# EAGLE board LPM3_front_panel_P3 (EAGLE 7.7.0)
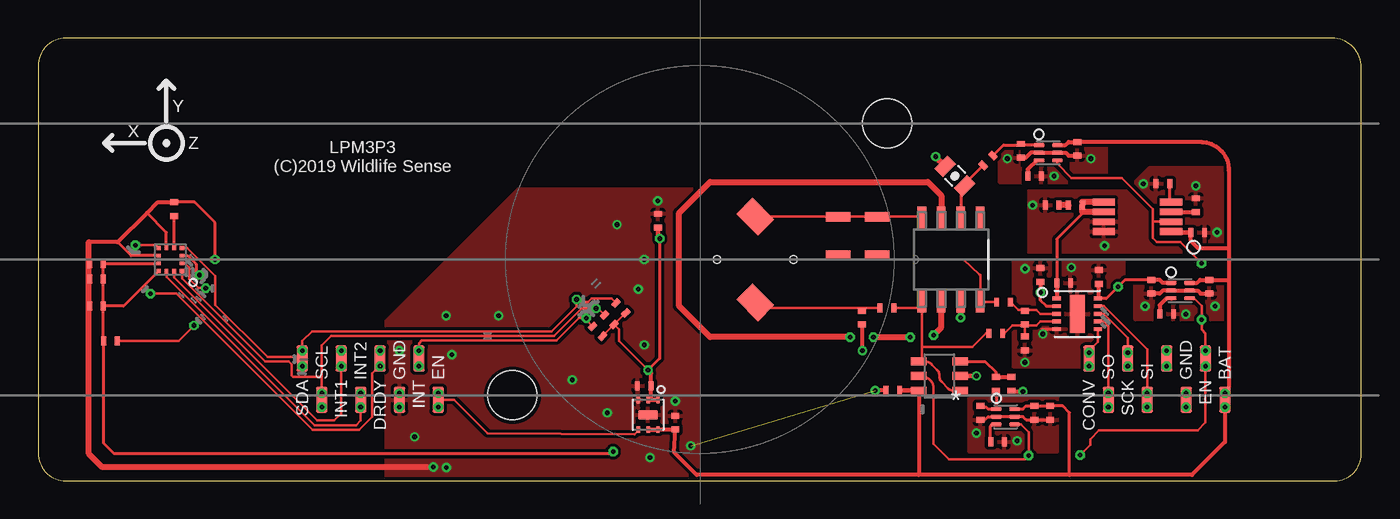
[diagram p0: board, top side]
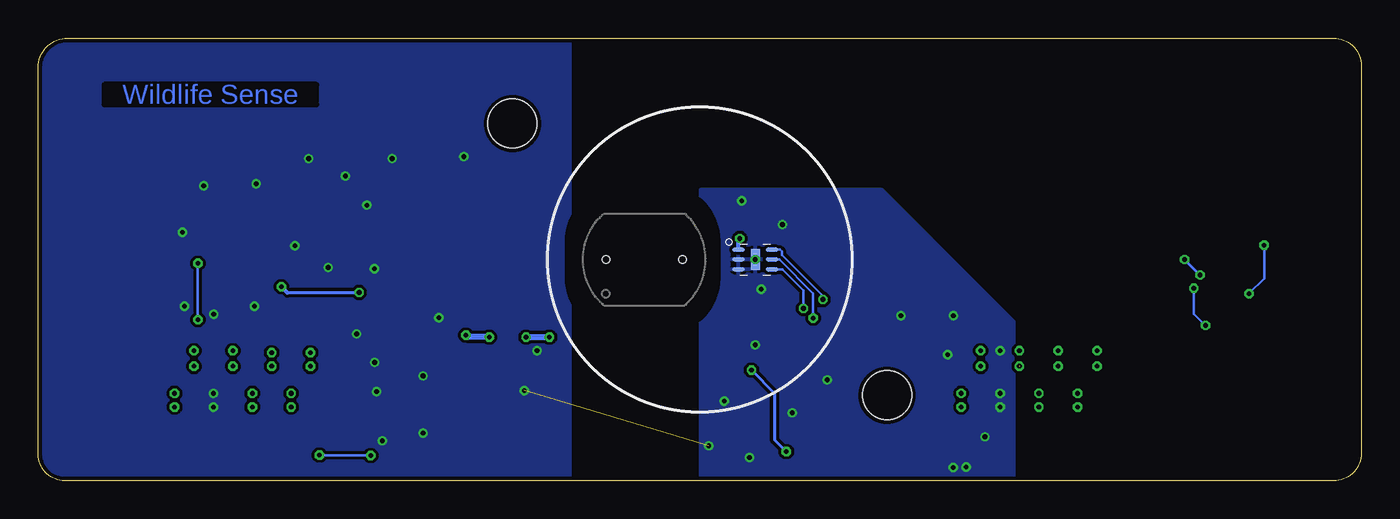
[diagram p1: board, bottom side, seen from below]

Size 86.51 x 28.96 mm. Coordinates in mm from the lower left corner, seen from the top.
Outline: 0,27.16 0,1.8 arc90 1.8,0 84.79,0 arc90 86.51,1.73 86.51,27.05 arc90 84.61,28.96 1.8,28.96 arc90 0,27.16
Copper layers (1*16): Top 0.035mm / dielectric 1.5mm / Bottom 0.035mm
Design rules "Nikos-SeeedStudio_2layer_DRU_no_angle_20140221": minimum track width 6mil, minimum drill 12mil, track to track 6mil, track to pad 10mil, pad to pad 10mil, via to via 10mil, smd to smd 6mil, copper to edge 10mil, drill to drill 10mil, minimum pad ring 10mil, minimum via ring 6mil, stop-mask expansion 0mil, vias tented up to drill 100mil, thermal gap 8mil
Net classes: 0 default: width 0.152 mm, clearance 0.203 mm; 1 supply: width 0.254 mm, clearance 0.254 mm
Holes 3.2 mm at 55.5,23.37 31.01,5.59
tKeepout: area 0,0 to 86.5,29; area 0,2 to 83.6,29

## Footprints (pad centres in the part's own frame; a part is rotated, then mirrored left to right if it is on the bottom)
VSON-10 = smd 0.6 x 0.25: P$1 -1.35,1; P$2 -1.35,0.5; P$3 -1.35,0; P$4 -1.35,-0.5; P$5 -1.35,-1; P$6 1.35,-1; P$7 1.35,-0.5; P$8 1.35,0; P$9 1.35,0.5; P$10 1.35,1 | smd 1 x 2.5: P$PAD 0,0
1206 = smd 1.6 x 0.635: P$1 0,1.27; P$2 0,-1.27
SMD_0402 = smd 0.6 x 0.4: 1 0,0.45; 2 0,-0.45
0805-CAP = smd 0.8 x 1.2: 1 -0.9,0; 2 0.9,0
S1133_FLAT_SIDEWAYS = smd 2 x 1.5 rotated 315: ANODE 0,2.8 | smd 1.5 x 2 rotated 45: CATHODE 0,-2.8 | hole 0.5: 2.5,0; -2.5,0
LGA_12_ST = smd 0.275 x 0.25: 1 -0.762,0.75; 2 -0.762,0.25; 3 -0.762,-0.25; 4 -0.762,-0.75; 7 0.762,-0.75; 8 0.762,-0.25; 9 0.762,0.25; 10 0.762,0.75 | smd 0.25 x 0.275: 5 -0.25,-0.762; 6 0.25,-0.762; 11 0.25,0.762; 12 -0.25,0.762
8_PIN_0.05"_SMD_ALTERN = smd 0.74 x 1.7: 1 -4.445,1.35; 2 -3.175,-1.35; 3 -1.905,1.35; 4 -0.635,-1.35; 5 0.635,1.35; 6 1.905,-1.35; 7 3.175,1.35; 8 4.445,-1.35
USON-6-0.65-OPT3001 = smd 0.8 x 0.25: P$1 -1.1,0.65; P$2 -1.1,0; P$3 -1.1,-0.65; P$4 1.1,-0.65; P$5 1.1,0; P$6 1.1,0.65 | smd 0.65 x 1.35: PAD 0,0
WSON-6-1.5MM-NO-PAD = smd 0.7 x 0.25: 1 -0.6,0.5; 2 -0.6,0; 3 -0.6,-0.5; 4 0.6,-0.5; 5 0.6,0; 6 0.6,0.5
USON-6-0.65 = smd 0.45 x 0.3: 1 -0.975,0.65; 2 -0.975,0; 3 -0.975,-0.65; 4 0.975,-0.65; 5 0.975,0; 6 0.975,0.65 | smd 0.635 x 1.27: PAD 0,0
SOIC127P600X175-8N = smd 1.473 x 0.559: 1 -2.718,1.905; 2 -2.718,0.635; 3 -2.718,-0.635; 4 -2.718,-1.905; 5 2.718,-1.905; 6 2.718,-0.635; 7 2.718,0.635; 8 2.718,1.905
OPA836_SOT23 = smd 1 x 0.5: 1 -1.35,0.95; 2 -1.35,0; 3 -1.35,-0.95; 4 1.35,-0.95; 5 1.35,0; 6 1.35,0.95
VSSOP8 = smd 1.45 x 0.45: P$1 -2.2,0.975; P$2 -2.2,0.325; P$3 -2.2,-0.325; P$4 -2.2,-0.975; P$5 2.2,-0.975; P$6 2.2,-0.325; P$7 2.2,0.325; P$8 2.2,0.975

## Placement (x,y rotation side)
ADC  ADS8866VSON10  [VSON-10]  67.94,10.92 0 top
C1  15pF  [1206]  52.32,16 0 top
C2  1uF  [SMD_0402]  65.15,4.45 0 top
C3  1uF  [SMD_0402]  67.94,21.72 0 top
C4  4.7uF  [SMD_0402]  64.26,21.59 0 top
C5  0.1uF  [SMD_0402]  55.88,5.91 270 top
C6  4.7uF  [SMD_0402]  61.59,4.45 0 top
C7  0.01uF  [SMD_0402]  62.74,2.54 90 top
C8  1uF  [SMD_0402]  41.66,3.81 180 top
C9  4.7uF  [SMD_0402]  39.62,6.22 270 top
C10  2.2uF  [SMD_0402]  66.17,4.45 0 top
C11  0.1uF  [SMD_0402]  40.51,17.02 180 top
C12  1uF  [SMD_0402]  76.58,12.7 0 top
C13  0.01uF  [SMD_0402]  65.15,19.94 90 top
C14  100uF  [0805-CAP]  59.94,19.94 135 top
C15  4.7uF  [SMD_0402]  72.77,12.7 0 top
C16  1uF  [SMD_0402]  65.53,13.46 180 top
C17  1uF  [SMD_0402]  69.34,13.34 180 top
C18  22uF  [SMD_0402]  67.06,12.95 270 top
C19  0.01uF  [SMD_0402]  73.79,10.92 90 top
C20  10uF  [SMD_0402]  3.81,13.21 270 top
C21  0.1uF  [SMD_0402]  3.81,14.22 270 top
C22  0.1uF  [SMD_0402]  3.81,11.43 270 top
C23  0.22uF  [SMD_0402]  8.89,17.78 180 top
C24  590pF  [SMD_0402]  64.52,8.99 180 top
C25  590pF  [SMD_0402]  64.52,10.67 180 top
CFLT  1uF  [SMD_0402]  73.53,19.43 270 top
CIN  0.1uF  [SMD_0402]  75.82,16.26 90 top
CL  22uF should change to 47uF 0603 or 0805  [SMD_0402]  67.82,18.03 270 top
D1  S1133_3  [S1133_FLAT_SIDEWAYS]  46.89,14.48 180 top
ISM303  ISM303DAC  [LGA_12_ST]  8.64,14.48 180 top
J1  8_PIN_0.05_INCH_SMD_FEMALE  [8_PIN_0.05"_SMD_ALTERN]  21.72,6.65 0 top
J2  8_PIN_0.05_INCH_SMD_FEMALE  [8_PIN_0.05"_SMD_ALTERN]  73.15,6.65 0 top
OPT  OPT3001  [USON-6-0.65-OPT3001]  39.62,14.48 0 bottom
R1  1G  [1206]  54.86,16 0 top
R2  22Ω 1%  [SMD_0402]  63.12,11.68 90 top
R3  100Ω  [SMD_0402]  62.1,20.95 135 top
R4  22Ω 1%  [SMD_0402]  62.61,9.65 90 top
R5  24k+  [SMD_0402]  62.61,6.35 180 top
R6  10k  [SMD_0402]  38.1,11.3 225 top
R7  10k  [SMD_0402]  36.58,9.78 225 top
R8  10k  [SMD_0402]  37.34,10.54 225 top
R9  1k-  [SMD_0402]  63.63,6.35 0 top
R11  0  [SMD_0402]  53.85,10.67 0 top
R12  0  [SMD_0402]  55.5,11.3 90 top
R14  10k  [SMD_0402]  4.72,9.14 90 top
REG1  TPS717-Q1  [WSON-6-1.5MM-NO-PAD]  66.04,21.46 0 top
REG2  TPS717-Q1  [WSON-6-1.5MM-NO-PAD]  74.68,12.45 0 top
REG3  TPS706USON-6  [USON-6-0.65]  39.88,4.32 270 top
REG4  TPS717-Q1  [WSON-6-1.5MM-NO-PAD]  63.25,4.19 0 top
RESR  8mΩ  [SMD_0402]  66.29,18.03 270 top
RLIM  120k  [SMD_0402]  75.69,18.03 180 top
U1  LMP7721  [SOIC127P600X175-8N]  59.69,14.48 90 top
U2  OPA836  [OPA836_SOT23]  58.93,6.86 180 top
VREF  REF6225  [VSSOP8]  71.88,17.27 180 top

## Library data of the parts
ADC = ADCs
C1-C13 C15-C25 CFLT CIN CL R1-R9 R11 R12 R14 RESR RLIM = Passives
C14 = SparkFun-Capacitors; PROD_ID: CAP-11624
D1 = S1133
ISM303 = MAG_ACC_GYR
J1 J2 = Connectors
OPT REG3 U1 = Nikos-library
REG1 REG2 REG4 = LPS3P2
U2 = Op-Amps
VREF = Voltage-regulators

## Nets
3V3_OPT_VCC: C9.1 C11.1 C20.1 C21.1 C22.1 ISM303.9 ISM303.10 OPT.P$1 R6.1 R7.1 R8.1 R14.1 REG3.1 REG3.2
BATTERY: C2.1 C3.1 C5.1 C8.1 C10.1 C12.1 CIN.1 J2.8 REG1.6 REG2.6 REG3.5 REG3.6 REG4.6 U2.6 VREF.P$1
CONVST: ADC.P$6 J2.1
FLT: CFLT.1 VREF.P$4
GND: ADC.P$5 ADC.P$PAD C2.2 C3.2 C4.2 C5.2 C6.2 C7.2 C8.2 C9.2 C10.2 C11.2 C12.2 C13.2 C14.2 C15.2 C16.2 C17.2 C18.1 C19.2 C20.2 C21.2 C22.2 C23.2 C24.1 CFLT.2 CIN.2 ISM303.3 ISM303.6 ISM303.8 J1.6 J2.6 OPT.P$2 OPT.P$3 OPT.PAD R9.2 R11.2 REG1.2 REG1.5 REG2.2 REG2.5 REG3.3 REG3.PAD REG4.2 REG4.5 RESR.2 RLIM.2 U1.3 U2.2 VREF.P$7 VREF.P$8
GUARD: U1.2 U1.7
I2C_EN: J1.8 REG3.4
ISM303_CS: ISM303.2 R14.2
ISM303_DRDY: ISM303.7 J1.5
ISM303_INT1: ISM303.12 J1.3
ISM303_INT2: ISM303.11 J1.4
MISO: ADC.P$7 J2.2
MOSI: ADC.P$9 J2.4
N$1: ADC.P$3 C25.2 R2.2
N$7: CL.2 RESR.1
N$8: C1.P$1 D1.CATHODE R1.P$1 U1.8
N$9: C19.1 REG2.3
N$10: D1.ANODE R11.1 R12.1
N$11: C14.1 R3.1 U1.6
N$13: ADC.P$4 C24.2 C25.1 R4.2
N$14: C23.1 ISM303.5
N$15: C7.1 REG4.3
N$16: C13.1 REG1.3
N$19: J2.5
ONOFF: J2.7 REG1.4 REG2.4 REG4.4 U2.5 VREF.P$2
OPAMP_VCC: C4.1 R3.2 REG1.1
OPT_INT: J1.7 OPT.P$5 R7.2
REF_V: ADC.P$1 C18.2 CL.1 VREF.P$5 VREF.P$6
REF_VCC: C6.1 R5.1 REG4.1
SCK: ADC.P$8 J2.3
SCL: ISM303.1 J1.2 OPT.P$4 R8.2
SDA: ISM303.4 J1.1 OPT.P$6 R6.2
SS: RLIM.1 VREF.P$3
TIA_OUT: C1.P$2 R1.P$2 R2.1 U1.4
V_BIAS: R5.2 R9.1 U2.3
VBIAS_AMP: R4.1 R12.2 U1.1 U2.1 U2.4
VCC_ADC: ADC.P$2 ADC.P$10 C15.1 C16.1 C17.1 REG2.1

## Tracks (layer width: path | path; a pad name or v marks a point on that pad's centre or on a via)
3V3_OPT_VCC  (via drill 0.3)
  Top 0.152: v39.88,7.24 37.97,9.14 37.97,9.91 R8.1 | R8.1 R7.1 | R6.1 R8.1
  Top 0.203: v37.59,1.91 37.47,1.78 4.95,1.78 4.27,2.46 R14.1 C22.1 | v40.64,15.85 40.64,8 v39.88,7.24 | C22.1 C20.1 C21.1 ISM303.9 | ISM303.10 5.58,11.43 C22.1
  Top 0.254: 4.26,9.09 R14.1 | REG3.2 40.07,5.29 C9.1 40.07,7.04 v39.88,7.24
  Top 0.305: REG3.1 REG3.2 | v40.64,15.85 40.51,15.98 C11.1
  Bottom 0.203: v39.88,7.24 38.35,5.71 38.35,2.67 v37.59,1.91
  Bottom 0.254: OPT.P$1 40.72,15.77 v40.64,15.85
BATTERY  (via drill 0.3)
  Top 0.203: REG4.6 64.39,4.7 64.58,4.89 C2.1 C10.1 66.99,4.89 67.44,4.45 67.44,0.38
  Top 0.254: 77.85,15.24 75.82,15.24 75.37,15.69 CIN.1 | 77.85,15.24 77.85,20.3 arc90 76.06,22.17 C3.1 67.38,22.17 67.17,21.96 REG1.6 | 77.85,15.24 77.85,13.15 | 77.85,13.15 77.85,6.1 v77.6,5.71 J2.8 v77.6,4.83 77.6,2.54 75.44,0.38 67.44,0.38 57.58,0.38 | 74.64,16.3 VREF.P$1 | 57.58,0.38 43.05,0.38 41.59,1.85 C8.1 | U2.6 57.58,0.38 | REG2.6 75.77,12.95 75.97,13.15 C12.1 77.85,13.15
  Top 0.305: VREF.P$1 74.04,16.26 CIN.1 | C8.1 REG3.6 REG3.5 | U2.6 C5.1
CONVST  (via drill 0.3)
  Top 0.152: ADC.P$6 69.3,9.1 68.71,8.51 v68.71,8.38 J2.1
  Top 0.254: v68.71,7.49 J2.1
FLT
  Top 0.203: VREF.P$4 73.98,18.35 CFLT.1
GND  (via drill 0.3)  (1 unrouted)
  Top 0.203: ISM303.8 6.08,14.73 5.18,15.62 5.21,15.62 | 65.66,9.92 66.67,9.92 | ISM303.3 9.76,14.73 10.31,14.17 10.31,13.69 v10.54,13.46 | C21.2 3.3,14.28 3.3,14.35 | C20.2 3.3,13.27 3.3,13.46 | C22.2 3.3,11.49 3.3,11.56 | v11.56,14.48 11.56,16.89 10.22,18.23 C23.2 | ISM303.6 8.38,16.26 7.11,17.53 | C6.2 61.59,4.06 61.98,4.06 62.1,4.19 REG4.2 REG4.5 64.39,4.19 64.58,4 C2.2 C10.2
  Top 0.254: R11.2 53.85,8.51 v53.9,8.51 | 5.18,15.62 3.3,15.62 | C15.2 73.34,12.25 73.53,12.45 REG2.2 REG2.5 75.82,12.45 76.02,12.25 C12.2 | C3.2 67.38,21.27 67.18,21.46 REG1.5 REG1.2 64.9,21.46 64.57,21.14 C4.2 | 5.21,15.62 7.11,17.53 7.82,18.23 C23.2 | R9.2 63.69,5.84 v64.39,5.84 | J2.6 v75.06,4.83 | C5.2 v54.74,5.91
  Top 0.305: U2.2 v61.34,6.86
  Top 0.406: 25.4,0.89 4.19,0.89 3.3,1.78 3.3,11.56 3.3,13.46 3.3,14.35 3.3,15.62 | C14.2 | C14.2 v58.67,21.21 | v60.33,10.67 U1.3
  Bottom 0.203: v10.54,13.46 v11.56,14.48
  other vias: 65.02,18.03 64.53,13.88 69.72,15.37 77.09,16.26 39.62,14.48 72.26,19.43 23.62,8.51 30.1,10.79 42.67,2.29 41.66,5.21 34.92,6.6 24.61,2.87 37.21,4.45 75.69,19.3 39.24,12.52 39.62,8.89 72.38,11.41 67.55,13.95 37.85,16.76 40.51,18.31 26.67,10.79 27.05,8.26 25.83,0.89 26.7,0.86 40.01,1.52 65.7,9.61 61.34,3.12 75.06,5.71 64.52,7.75 68.83,21.08 63.37,21.08 66.42,19.94 75.04,10.91 76.95,11.41 64.01,2.62 23.62,4.83 23.62,5.71
  pour Bottom: 31.37,19.05 22.73,10.41 22.73,0 43.18,0 43.18,19.05
  pour Top: 22.73,0 43.18,0 43.18,19.05 31.37,19.05 22.73,10.41
  cutout Top: 64.26,22.35 64.26,20.57 67.44,20.57 67.44,22.35
  cutout Top: 60.07,20.83 60.83,20.07 59.82,19.05 59.05,19.81
  pour Bottom: 51.69,0 51.69,28.96 86.51,28.96 86.51,0
  pour Top: 62.87,19.56 69.85,19.56 69.85,21.97 62.87,21.97
  pour Top: 64.77,18.92 64.77,14.99 77.85,14.99 77.85,20.45 72.64,20.45 71.12,18.92
  pour Top: 71.75,13.34 78.11,13.34 78.11,10.54 71.75,10.54
  pour Top: 69.34,8.76 70.99,8.76 70.99,14.35 63.75,14.35 63.75,7.49 69.34,7.49
  pour Top: 60.83,1.91 66.67,1.91 66.67,5.46 60.83,5.46
GUARD  (via drill 0.3)
  Top 0.406: v53.09,9.4 43.94,9.4 41.91,11.43 41.91,17.53 43.94,19.56 58.17,19.56 59.05,18.67 U1.7 | v54.61,9.4 v57.02,9.4 | v58.55,9.53 59.05,10.03 U1.2 59.05,12.19
  Bottom 0.406: v57.02,9.4 58.42,9.4 v58.55,9.53 | v54.61,9.4 v53.09,9.4
I2C_EN  (via drill 0.3)
  Top 0.152: REG3.4 39.28,3.34 38.99,3.05 29.4,3.09 27.19,5.3 J1.8
  Top 0.203: v26.16,5.71 J1.8 v26.16,4.83
ISM303_CS  (via drill 0.3)
  Top 0.152: R14.2 9.17,9.14 v10.19,10.16 | v10.95,12.6 10.49,12.6 9.88,13.21 9.88,13.97 9.62,14.23 ISM303.2
  Bottom 0.152: v10.19,10.16 10.95,10.92 v10.95,12.6
ISM303_DRDY  (via drill 0.3)  (1 unrouted)
  Top 0.152: ISM303.7 7.68,15.42 v6.35,15.42 | v7.34,12.24 9.02,12.24 17.93,3.33 20.98,3.33 21.84,4.19 21.84,7.01 22.35,7.52 J1.5
  Top 0.203: J1.5 v22.35,8.51
  Bottom 0.152: v6.35,15.42 6.35,13.23 v7.34,12.24
  other vias: 22.35,7.49
ISM303_INT1  (via drill 0.3)
  Top 0.152: J1.3 v19.81,7.49 19.81,4.39 19.36,3.94 18.24,3.94 8.89,13.29 ISM303.12
  Top 0.203: v19.81,8.51 J1.3
ISM303_INT2  (via drill 0.3)
  Top 0.152: J1.4 v21.08,4.83 21.08,3.94 20.78,3.63 18.09,3.63 8.39,13.33 ISM303.11
  Top 0.203: v21.08,5.71 J1.4
MISO  (via drill 0.3)
  Top 0.152: ADC.P$7 69.66,10.42 69.98,10.11 v69.98,5.71 J2.2
  Top 0.254: v69.98,4.83 J2.2
MOSI  (via drill 0.3)
  Top 0.152: ADC.P$9 69.68,11.42 72.52,8.59 v72.52,5.71 J2.4
  Top 0.254: v72.52,4.83 J2.4
N$1
  Top 0.152: ADC.P$3 65.53,10.92 65.28,11.18 64.52,11.18 | 64.52,11.18 64.08,11.18 R2.2 | C25.2 64.52,11.18
N$2
  cutout Top: 73.15,13.34 73.15,11.56 76.2,11.56 76.2,13.34
  cutout Top: 61.21,5.08 61.21,4.19 61.98,4.19 61.98,3.3 64.77,3.3 64.77,5.08
N$5
  cutout Bottom: 52.07,15.69 52.07,13.26 arc-90 48.46,9.65 45.5,9.65 arc-90 41.91,13.24 41.91,15.71 arc-90 45.5,19.3 48.46,19.3 arc-90
N$6
  cutout Top: 58.67,18.03 58.67,10.92 arc-90 57.4,9.65 45.52,9.65 arc-90 41.91,13.26 41.91,15.71 arc-90 45.5,19.3 57.4,19.3 arc-90
N$7
  Top 0.406: CL.2 RESR.1
N$8
  Top 0.152: D1.CATHODE C1.P$1 | C1.P$1 R1.P$1 | R1.P$1 57.78,17.28 U1.8 | R1.P$1 | C1.P$1
N$9
  Top 0.254: REG2.3 74.1,11.92 73.77,11.92 73.34,11.49 C19.1
N$10
  Top 0.152: D1.ANODE 46.99,11.3 53.85,11.3 | 53.85,11.3 R12.1 | R11.1 53.85,11.3
N$11
  Top 0.203: R3.1 60.58,19.43 C14.1 60.33,19.05 U1.6
N$13
  Top 0.152: ADC.P$4 65.54,10.42 65.28,10.16 64.52,10.16 | 64.52,10.16 63.7,10.16 63.19,9.65 R4.2 | 64.52,10.16 C25.1 C24.2
N$14
  Top 0.203: ISM303.5 C23.1
N$15
  Top 0.203: REG4.3 62.37,3.69 62.23,3.56 62.23,2.6 C7.1
N$16
  Top 0.254: REG1.3 65.29,20.96 64.7,20.38 C13.1
N$21  (via drill 0.3)
  other vias: 73.79,7.49
N$22  (via drill 0.3)
  other vias: 73.79,8.51
ONOFF  (via drill 0.3)
  Top 0.152: U2.5 57.91,6.86 58.19,6.69 arc-59 58.55,6.06 58.55,2.41 59.56,1.4 64.52,1.4 v64.77,1.65 64.77,3.17 64.25,3.69 REG4.4 | v68.12,1.68 68.78,2.34 68.78,2.72 69.34,3.3 75.82,3.3 76.33,3.81 v76.33,7.49 J2.7 v76.33,8.51 76.33,9.65 76.07,9.91 v76.07,10.54 76.07,11.43 75.56,11.95 REG2.4 | REG1.4 66.64,20.74 67.56,19.81 70.87,19.81 72.9,17.78 72.9,16.95 | VREF.P$2 72.9,16.95 | v76.07,14.22 74.68,15.62 73.15,15.62 72.9,15.88 72.9,16.95
  Bottom 0.152: v64.77,1.65 68.1,1.65 v68.12,1.68 | v76.07,10.54 v76.07,14.22
OPAMP_VCC
  Top 0.203: 65.28,21.97 64.33,21.97 C4.1 64.19,21.97 63.12,21.97 R3.2
  Top 0.254: REG1.1 65.29,21.96 65.28,21.97
OPT_INT  (via drill 0.3)
  Top 0.152: R7.2 35.84,10.52 v35.84,10.64 35.36,10.64 33.88,9.17 25.07,9.17 24.89,8.99 v24.89,8.51 J1.7
  Top 0.203: J1.7 v24.89,7.49
  Bottom 0.152: v35.84,10.64 35.84,12.27 38.05,14.48 OPT.P$5
REF_V
  Top 0.203: CL.1 68.33,18.29 | 68.27,17.6 68.27,17.47 66.61,15.81 C18.2
  Top 0.254: 66.67,11.92 ADC.P$1 66.59,12.94 C18.2
  Top 0.406: VREF.P$5 68.27,18.25 CL.1 68.27,17.6 VREF.P$6
REF_VCC
  Top 0.203: C6.1 61.59,4.83 61.98,4.83 62.11,4.69 REG4.1 62.65,5.87 R5.1
SCK  (via drill 0.3)
  Top 0.152: ADC.P$8 69.67,10.92 71.25,9.35 v71.25,8.38 J2.3
  Top 0.254: v71.25,7.49 J2.3
SCL  (via drill 0.3)
  Top 0.152: R8.2 36.6,11.28 v36.47,11.28 35.53,11.28 33.73,9.47 19.15,9.47 18.54,8.87 18.54,6.78 | 18.54,6.78 v18.54,5.71 J1.2 | ISM303.1 9.4,13.23 14.83,7.8 16.38,7.8 16.56,7.62 16.56,6.91 16.66,6.81 18.52,6.81 18.54,6.78
  Top 0.203: v18.54,4.83 J1.2
  Bottom 0.152: v36.47,11.28 36.47,12.45 37.86,13.83 OPT.P$4
SDA  (via drill 0.3)
  Top 0.152: R6.2 37.49,11.91 36.2,11.91 35.97,11.68 35.38,11.68 v35.2,11.86 35.2,11.4 33.58,9.78 17.91,9.78 17.27,9.14 v17.27,8.51 J1.1 17.17,8.1 14.99,8.1 11.58,11.51 11.58,13.39 9.74,15.23 ISM303.4
  Top 0.203: J1.1 v17.27,7.49
  Bottom 0.152: v35.2,11.86 35.2,12.09 37.87,14.76 37.87,14.99 38.01,15.13 OPT.P$6
SS
  Top 0.254: VREF.P$3 75.58,17.6 RLIM.1
TIA_OUT
  Top 0.152: 54.86,14.48 60.5,14.48 61.54,13.51 61.59,13.46 U1.4 61.8,11.68 R2.1 | 54.86,14.48 52.32,14.48 C1.P$2 | R1.P$2 54.86,14.48
V_BIAS
  Top 0.203: U2.3 61.91,7.81 62.61,7.11 R5.2
  Top 0.254: R9.1 62.73,6.8 62.67,6.86 R5.2
VBIAS_AMP
  Top 0.152: 57.78,11.3 57.78,8.76 | 57.78,8.76 57.78,7.81 U2.4 57.93,7.81 arc-45 58.44,7.6 58.78,7.26 arc-45 58.93,6.9 58.93,6.81 arc45 59.08,6.46 59.48,6.05 arc45 59.82,5.91 U2.1 | R12.2 57.78,11.3 | 57.78,11.3 U1.1 | R4.1 61.98,9.65 61.09,8.76 57.78,8.76
VCC_ADC  (via drill 0.3)
  Top 0.203: ADC.P$10 69.83,11.92 v70.61,12.7 71.06,13.15 C15.1 | C16.1 65.53,11.81 65.92,11.42 ADC.P$2
  Top 0.254: ADC.P$10 69.34,11.92 C17.1 | C16.1 v65.53,12.32 | REG2.1 74.07,12.95 73.53,12.95 73.34,13.15 C15.1
  Bottom 0.203: 70.23,12.32 v65.53,12.32
  Bottom 0.254: v70.61,12.7 70.23,12.32

## Text on the board
Bottom: Wildlife Sense
tPlace: Y | X | Z | LPM3P3 / (C)2019 Wildlife Sense | EN | BAT
tNames: SDA | SCL | INT1 | INT2 | DRDY | GND | INT | EN | CONV | SO | SCK | SI | GND